# Altium PCB PCB.PcbDoc (part 1 of 3)
Units mil, origin at the board's own origin, x right, y up, seen from the top; angles counter-clockwise.
Board outline 3149.61 x 3937.01 mil, 2 copper layers (Top Layer, Bottom Layer); 240 components, 174 nets, 738 pads, 225 vias.
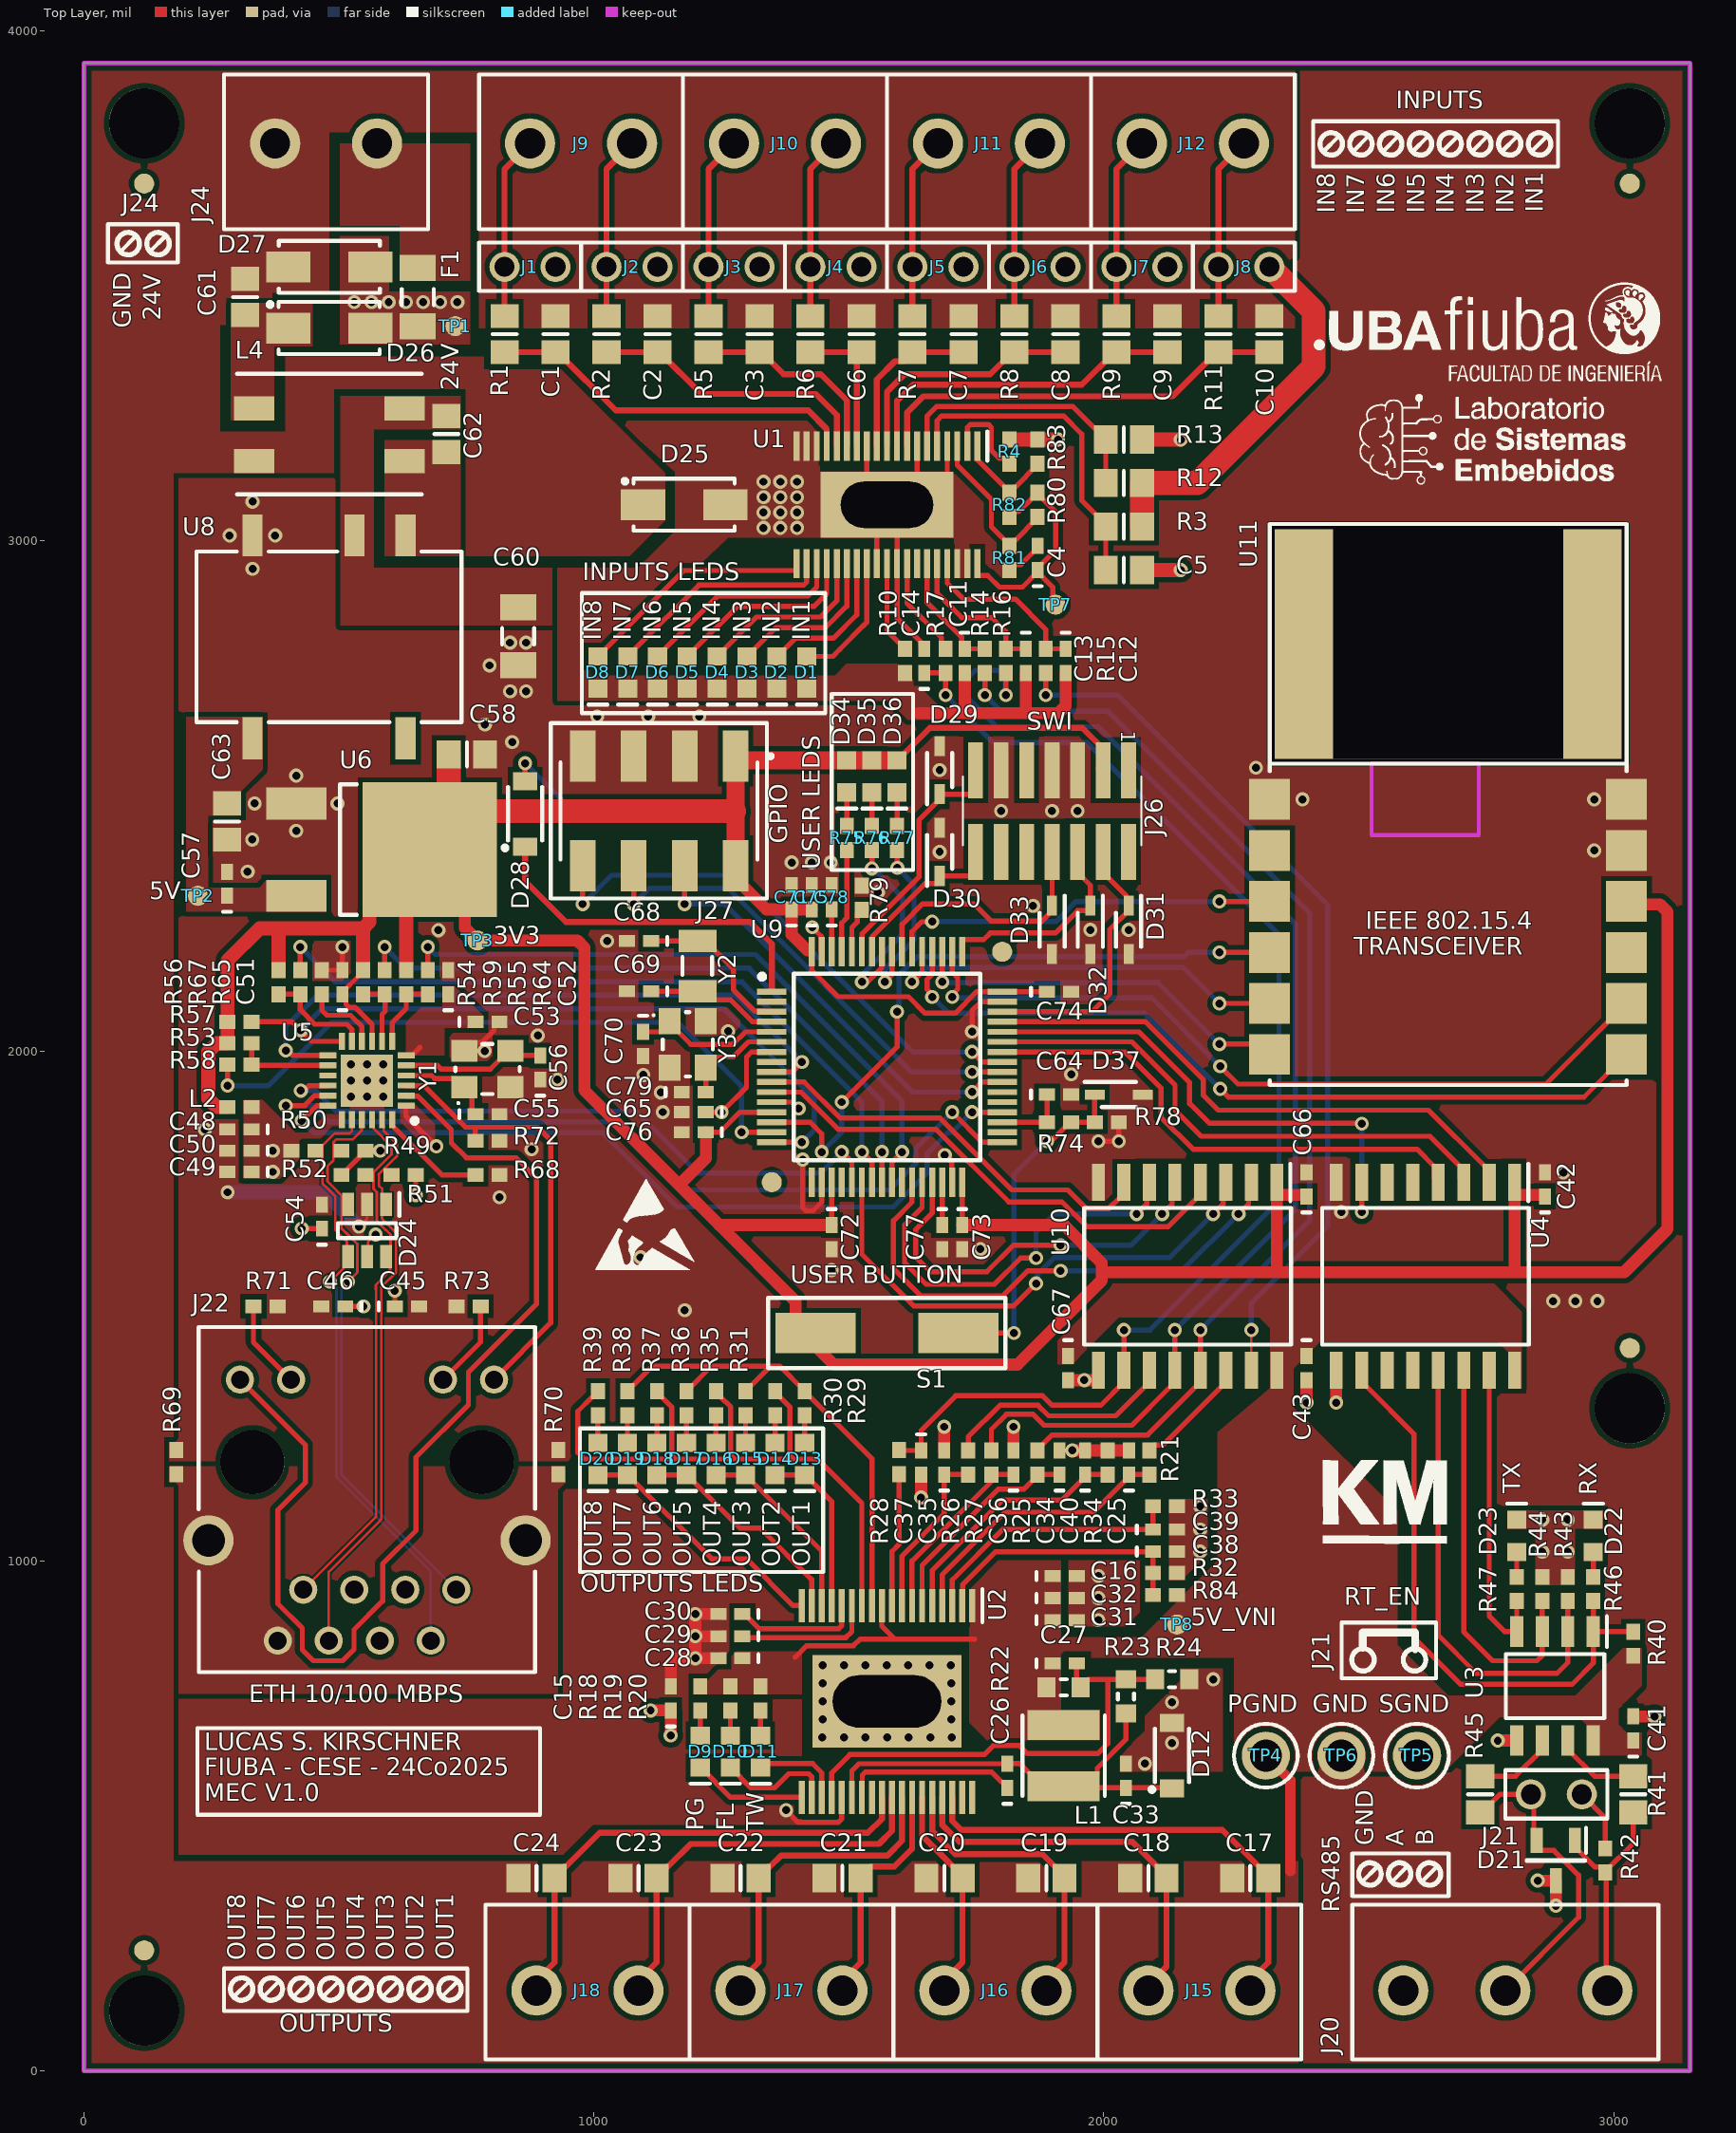
[diagram p0: Top Layer view]
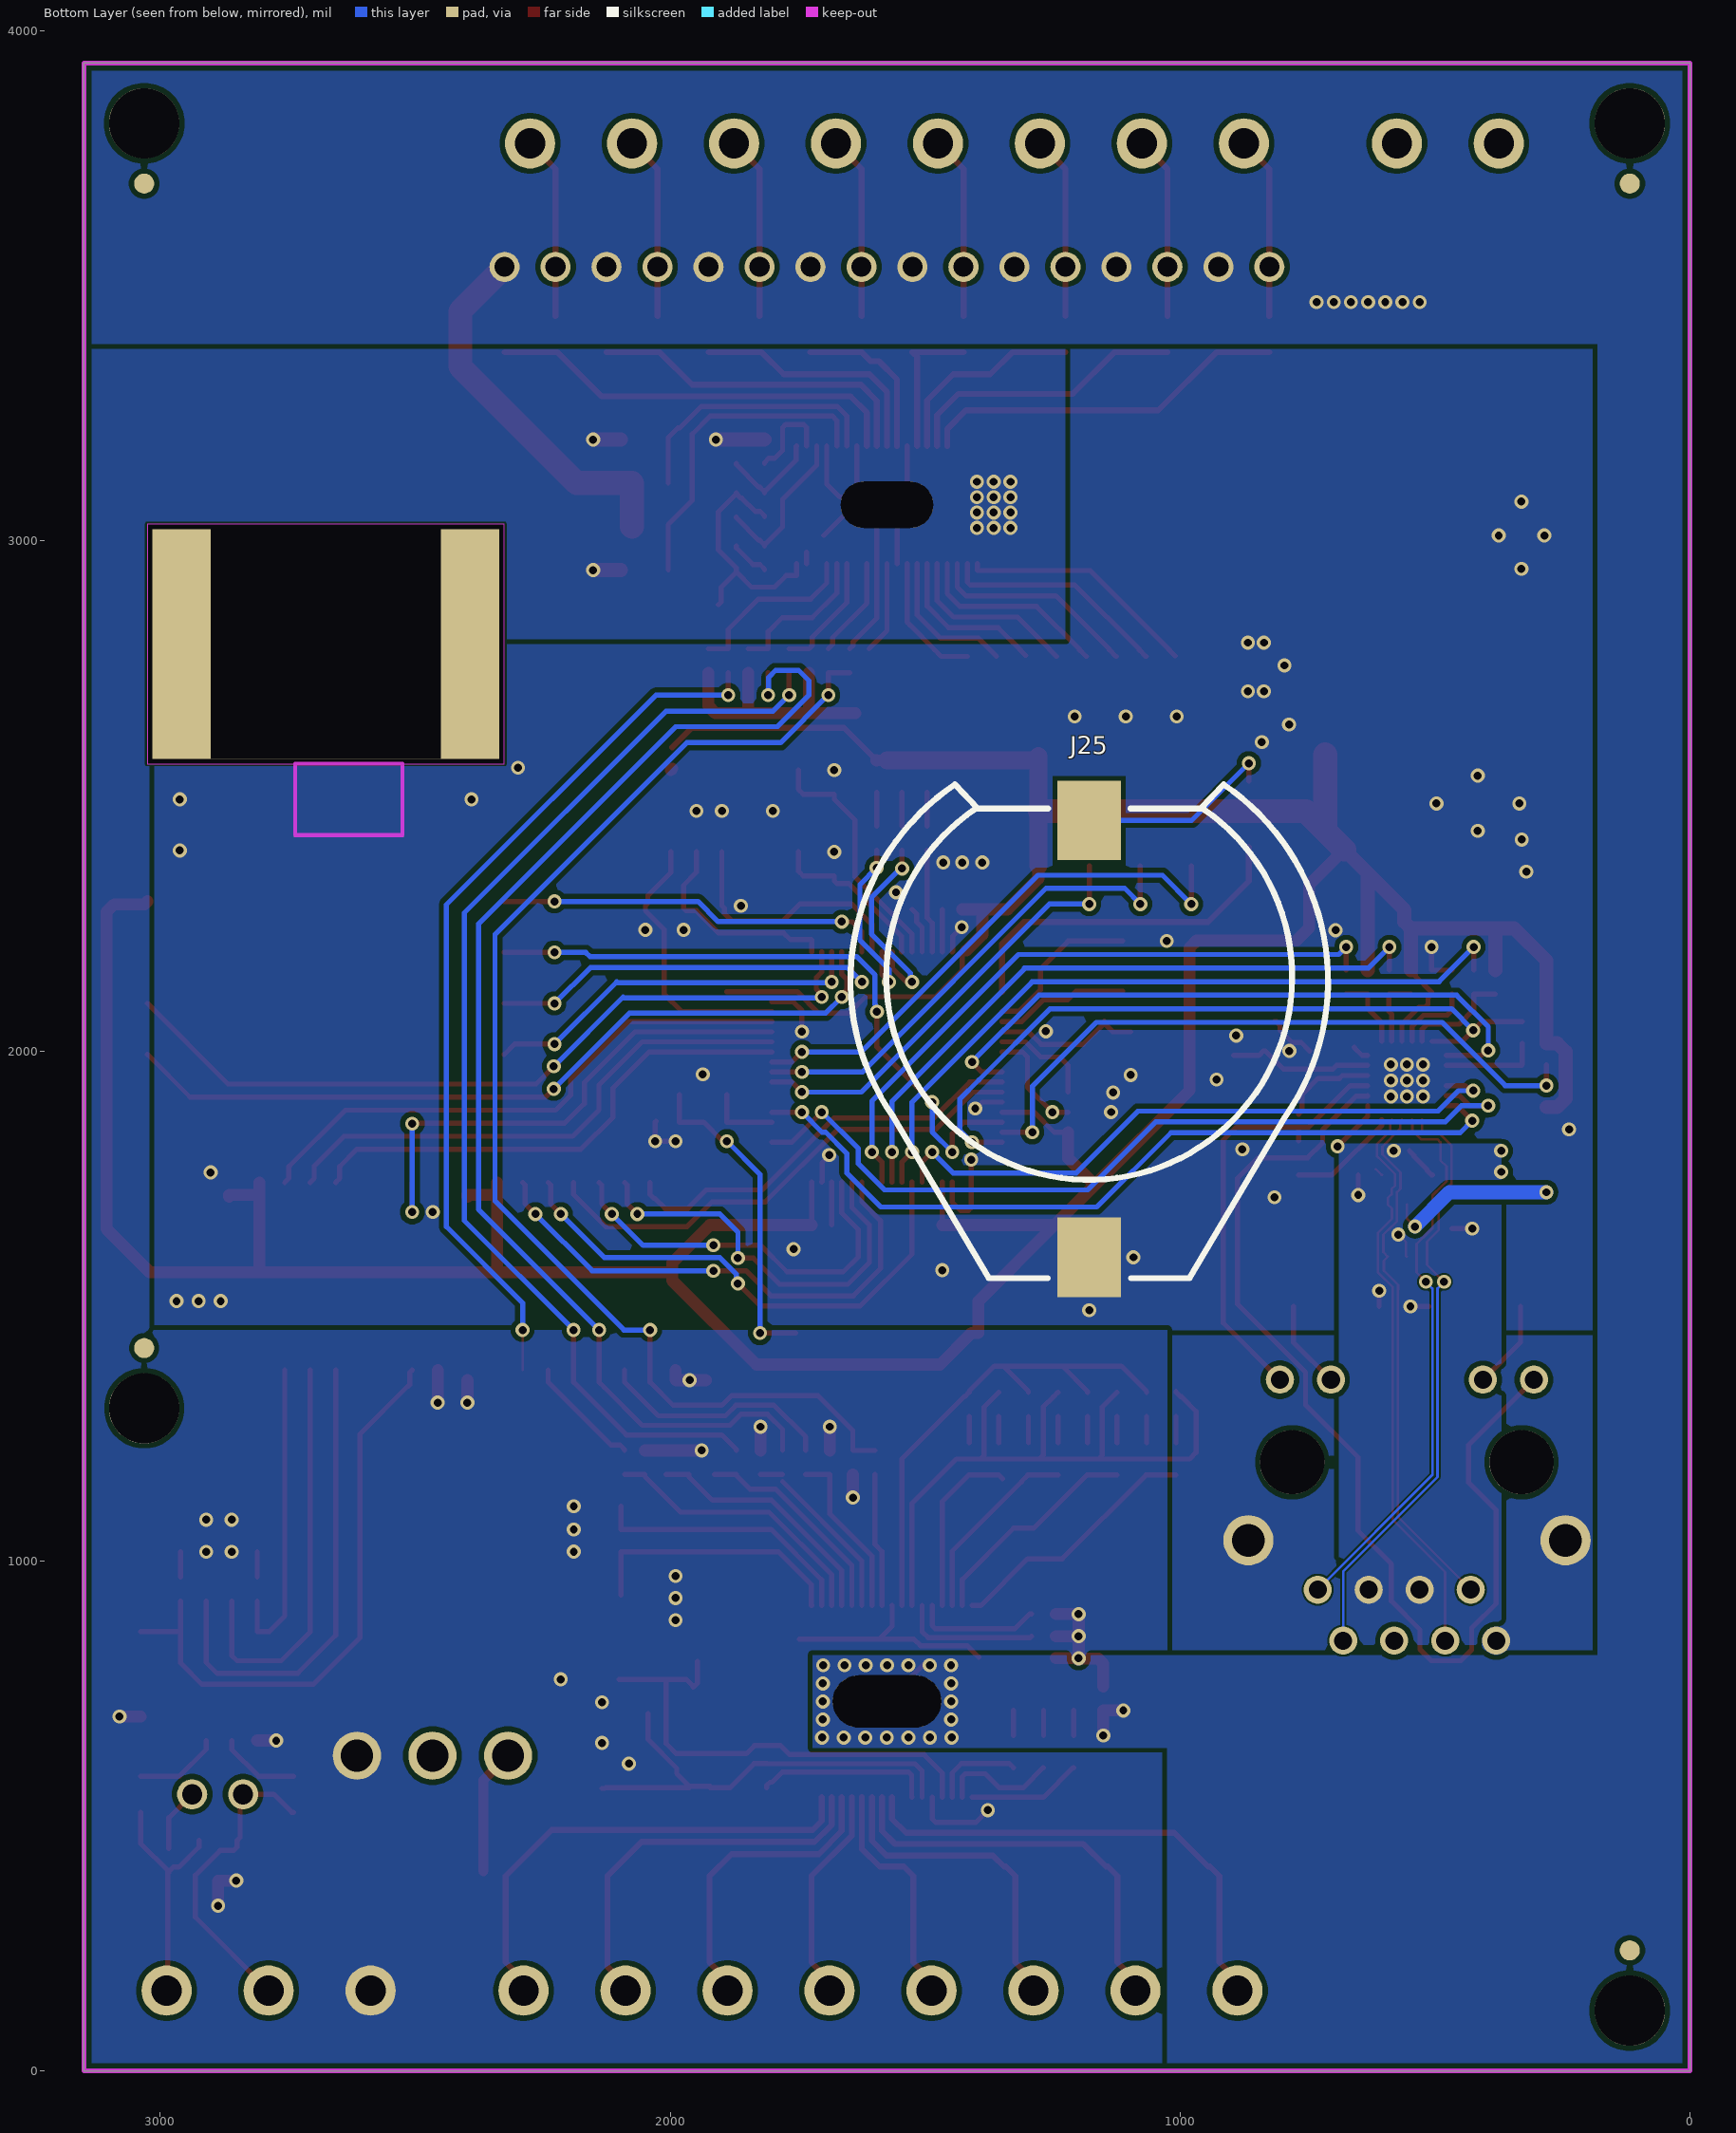
[diagram p1: Bottom Layer view, seen from below]

## Layer stack, top to bottom
Top Solder: solder mask 0.4, Solder Resist, Dk 3.5
Top Layer: signal copper 1.4
Dielectric 1: dielectric 12.6, FR-4, Dk 4.8
Bottom Layer: signal copper 1.4
Bottom Solder: solder mask 0.4, Solder Resist, Dk 3.5

## Board outline
0,0 0,3937.01 3149.61,3937.01 3149.61,0
cut-out: 2325.24,3033.15 3025.24,3033.15 3025.24,2563.15 2325.24,2563.15

## Design rules (kind name [scope] priority, off if disabled: settings)
Clearance Clearance_ETH [InNet('RD_N') or InNet('RD_P') or  InNet('TD_N') or InNet('TD_P')] p1: gap=3.94 ignorepadtopadclearanceinfootprint=FALSE
Clearance [All] p2: gap=5 ignorepadtopadclearanceinfootprint=FALSE except(10: Arc-Poly Track-Poly SMDPad-Poly THPad-Poly Via-Poly Fill-Poly Poly-Poly)
DiffPairsRouting [All] p1: maxlimit=10 minlimit=5 mostfreqgap=5 toplayer_minwidth=5 toplayer_maxwidth=10 toplayer_prefwidth=5 bottomlayer_minwidth=5 bottomlayer_maxwidth=10 bottomlayer_prefwidth=5 maxuncoupledlength=500
HoleSize [All] p1: absolutevalues=TRUE maxlimit=393.7 minlimit=7.87 maxpercent=80.000 minpercent=20.000
HoleToHoleClearance [All] p1: gap=5 allowstackedmicrovias=TRUE
MinimumSolderMaskSliver [All] p1: minsoldermaskwidth=0
PolygonConnect [All] p1: connectstyle=Direct reliefconductorwidth=10 reliefentries=4 polygonreliefangle="90 Angle" airgapwidth=10
RoomDefinition "U_Ethernet Interface (ETH)" [InComponentClass('U_Ethernet Interface (ETH)')] p1: confinementstyle=ConfineIn formatcopy=TRUE lockcomponents=FALSE outline 0,0 1207.48,0 1207.48,2259.84 0,2259.84
RoomDefinition "U_Microcontroller (MCU)" [InComponentClass('U_Microcontroller (MCU)')] p2: confinementstyle=ConfineIn formatcopy=TRUE lockcomponents=FALSE outline 0,0 3149.61,0 3149.61,3937.01 0,3937.01
RoomDefinition "U_RF Transceiver Module (RF)" [InComponentClass('U_RF Transceiver Module (RF)')] p3: confinementstyle=ConfineIn formatcopy=TRUE lockcomponents=FALSE outline 2236.22,1880.91 3113.19,1880.91 3113.19,3084.65 2236.22,3084.65
RoomDefinition "U_Digital Input (DIN)" [InComponentClass('U_Digital Input (DIN)')] p4: confinementstyle=ConfineIn formatcopy=TRUE lockcomponents=FALSE outline 712.6,2637.8 2440.94,2637.8 2440.94,3937.01 712.6,3937.01
RoomDefinition "U_Power Supply (PWR)" [InComponentClass('U_Power Supply (PWR)')] p5: confinementstyle=ConfineIn formatcopy=TRUE lockcomponents=FALSE outline 0,0 2734.25,0 2734.25,3937.01 0,3937.01
RoomDefinition "U_Industrial Serial Comm (RS485)" [InComponentClass('U_Industrial Serial Comm (RS485)')] p6: confinementstyle=ConfineIn formatcopy=TRUE lockcomponents=FALSE outline 2360.24,0 3149.61,0 3149.61,1795.28 2360.24,1795.28
RoomDefinition "U_Digital Output (DOUT)" [InComponentClass('U_Digital Output (DOUT)')] p7: confinementstyle=ConfineIn formatcopy=TRUE lockcomponents=FALSE outline 708.66,0 2425.2,0 2425.2,1417.32 708.66,1417.32
RoutingVias [All] p1: holewidth=15.75 width=27.56 viastyle="Through Hole" minholewidth=7.87 minwidth=15.75 maxholewidth=15.75 maxwidth=27.56
SilkToSilkClearance [All] p1: silktosilkclearance=5
SilkToSolderMaskClearance [IsPad] p1: minsilkscreentomaskgap=5 clearancetoexposedcopper=TRUE
SolderMaskExpansion [All] p1: expansion=4 istentingtop=FALSE
Width [All] p1: maxlimit=200 minlimit=3.94 preferedwidth=10
24 further rules are at their usual default settings.

## Classes and differential pairs
differential pair class MDI_TD: TD
differential pair class MDI_RD: RD
net class RMII: ETH_CRS_DV ETH_MDC ETH_MDIO ETH_REF_CLK ETH_RXD0 ETH_RXD1 ETH_TX_EN ETH_TXD0 ETH_TXD1
component class "U_RF Transceiver Module (RF)": U11
component class "U_Power Supply (PWR)": C57 C58 C60 C61 C62 C63 D25 D26 D27 F1 J24 L4 TP1 TP2 TP3 TP4 TP5 TP6 U6 U8 X2
component class "U_Microcontroller (MCU)": C64 C65 C66 C67 C68 C69 C70 C71 C72 C73 C74 C75 C76 C77 C78 C79 D28 D29 D30 D31 D32 D33 D34 D35 D36 D37 J25 J26 J27 R74 R75 R76 R77 R78 R79 S1 U9 U10 Y2 Y3
component class "U_Industrial Serial Comm (RS485)": C41 C42 C43 D21 D22 D23 J20 J21 R40 R41 R42 R43 R44 R45 R46 R47 U3 U4
component class "U_Ethernet Interface (ETH)": C45 C46 C48 C49 C50 C51 C52 C53 C54 C55 C56 D24 J22 L2 R49 R50 R51 R52 R53 R54 R55 R56 R57 R58 R59 R64 R65 R67 R68 R69 R70 R71 R72 R73 U5 Y1
component class "U_Digital Output (DOUT)": C15 C16 C17 C18 C19 C20 C21 C22 C23 C24 C25 C26 C27 C28 C29 C30 C31 C32 C33 C34 C35 C36 C37 C38 C39 C40 D9 D10 D11 D12 D13 D14 D15 D16 D17 D18 D19 D20 J15 J16 J17 J18 L1 R18 R19 R20 R21 R22 R23 R24 R25 R26 R27 R28 R29 R30 R31 R32 R33 R34 R35 R36 R37 R38 R39 R84 TP8 U2
component class "U_Digital Input (DIN)": C1 C2 C3 C4 C5 C6 C7 C8 C9 C10 C11 C12 C13 C14 D1 D2 D3 D4 D5 D6 D7 D8 J1 J2 J3 J4 J5 J6 J7 J8 J9 J10 J11 J12 R1 R2 R3 R4 R5 R6 R7 R8 R9 R10 R11 R12 R13 R14 R15 R16 R17 R80 R81 R82 R83 TP7 U1
differential pair TD: +TD_P -TD_N
differential pair RD: +RD_P -RD_N

## Components (designator, comment, footprint, x,y, rotation, side; value= is the part's Value field where it differs from the comment)
C1 "Multilayer Ceramic Capacitors" CAPC2012N 924.8,3405.51 r90 top value=22nF
C2 "Multilayer Ceramic Capacitors" CAPC2012N 1124.8,3405.51 r90 top value=22nF
C3 "Multilayer Ceramic Capacitors" CAPC2012N 1324.8,3405.51 r90 top value=22nF
C4 "Multilayer Ceramic Capacitors" CAPC1005N 1870.08,2966.54 r90 top value=100nF
C5 "Multilayer Ceramic Capacitors" CAPC2012N 2039.37,2942.91 r0 top value=33nF
C6 "Multilayer Ceramic Capacitors" CAPC2012N 1524.8,3405.51 r90 top value=22nF
C7 "Multilayer Ceramic Capacitors" CAPC2012N 1724.8,3405.51 r90 top value=22nF
C8 "Multilayer Ceramic Capacitors" CAPC2012N 1924.8,3405.51 r90 top value=22nF
C9 "Multilayer Ceramic Capacitors" CAPC2012N 2124.8,3405.51 r90 top value=22nF
C10 "Multilayer Ceramic Capacitors" CAPC2012N 2324.8,3405.51 r90 top value=22nF
C11 "Multilayer Ceramic Capacitors" CAPC1005N 1727.61,2764.8 r270 top value=33pF
C12 "Multilayer Ceramic Capacitors" CAPC1005N 1925.2,2764.8 r270 top value=33pF
C13 "Multilayer Ceramic Capacitors" CAPC1005N 1846.95,2764.8 r270 top value=33pF
C14 "Multilayer Ceramic Capacitors" CAPC1005N 1648.05,2764.8 r90 top value=33pF
C15 "Multilayer Ceramic Capacitors" CAPC1005N 1150.59,730.32 r90 top value=1uF
C16 "Multilayer Ceramic Capacitors" CAPC1005N 1923.23,970.47 r0 top value=100pF
C17 "Multilayer Ceramic Capacitors" CAPC2012N 2287.48,377.95 r180 top value=22nF
C18 "Multilayer Ceramic Capacitors" CAPC2012N 2087.48,377.95 r180 top value=22nF
C19 "Multilayer Ceramic Capacitors" CAPC2012N 1887.48,377.95 r180 top value=22nF
C20 "Multilayer Ceramic Capacitors" CAPC2012N 1687.48,377.95 r180 top value=22nF
C21 "Multilayer Ceramic Capacitors" CAPC2012N 1487.48,377.95 r180 top value=22nF
C22 "Multilayer Ceramic Capacitors" CAPC2012N 1287.48,377.95 r180 top value=22nF
C23 "Multilayer Ceramic Capacitors" CAPC2012N 1087.48,377.95 r180 top value=22nF
C24 "Multilayer Ceramic Capacitors" CAPC2012N 887.48,377.95 r180 top value=22nF
C25 "Multilayer Ceramic Capacitors" CAPC1005N 2049.41,1192.91 r90 top value=33pF
C26 "Multilayer Ceramic Capacitors" CAPC1005N 1811.02,578.74 r90 top value=22nF
C27 "Multilayer Ceramic Capacitors" CAPC1005N 1923.2,799.21 r0 top value=10nF
C28 "Multilayer Ceramic Capacitors" CAPC1005N 1267.72,809.05 r180 top value=100nF
C29 "Multilayer Ceramic Capacitors" CAPC1005N 1267.72,852.36 r180 top value=10nF
C30 "Multilayer Ceramic Capacitors" CAPC1005N 1267.72,895.67 r180 top value=10nF
C31 "Multilayer Ceramic Capacitors" CAPC1005N 1923.2,883.86 r0 top value=470nF
C32 "Multilayer Ceramic Capacitors" CAPC1005N 1923.2,927.17 r0 top value=4.7uF
C33 "Multilayer Ceramic Capacitors" CAPC1005N 2043.31,578.74 r90 top value=100pF
C34 "Multilayer Ceramic Capacitors" CAPC1005N 1913.38,1192.91 r90 top value=33pF
C35 "Multilayer Ceramic Capacitors" CAPC1005N 1687,1192.91 r90 top value=33pF
C36 "Multilayer Ceramic Capacitors" CAPC1005N 1822.83,1192.91 r90 top value=33pF
C37 "Multilayer Ceramic Capacitors" CAPC1005N 1641.73,1192.91 r270 top value=33pF
C38 "Multilayer Ceramic Capacitors" CAPC1005N 2120.08,1018.11 r0 top value=100pF
C39 "Multilayer Ceramic Capacitors" CAPC1005N 2120.08,1061.62 r0 top value=100pF
C40 "Multilayer Ceramic Capacitors" CAPC1005N 1963.58,1192.91 r90 top value=100pF
C41 "Multilayer Ceramic Capacitors" CAPC1005N 3038.38,671.3 r90 top value=100nF
C42 "Multilayer Ceramic Capacitors" CAPC1005N 2865.16,1738.19 r90 top value=100nF
C43 "Multilayer Ceramic Capacitors" CAPC1005N 2397.64,1377.95 r270 top value=100nF
C45 "Multilayer Ceramic Capacitors" CAPC1005N 633.2,1499.02 r0 top value=100nF
C46 "Multilayer Ceramic Capacitors" CAPC1005N 488.78,1499.02 r180 top value=100nF
C48 "Multilayer Ceramic Capacitors" CAPC1005N 305.12,1846.13 r180 top value=100nF
C49 "Multilayer Ceramic Capacitors" CAPC1005N 305.12,1762.8 r180 top value=100nF
C50 "Multilayer Ceramic Capacitors" CAPC1005N 305.12,1804.46 r180 top value=100nF
C51 "Multilayer Ceramic Capacitors" CAPC1005N 506.89,2134.84 r90 top value=100nF
C52 "Multilayer Ceramic Capacitors" CAPC1005N 714.57,2134.84 r90 top value=1uF
C53 "Multilayer Ceramic Capacitors" CAPC1005N 791.34,2057.09 r0 top value=470pF
C54 "Multilayer Ceramic Capacitors" CAPC1005N 466.54,1675.2 r90 top value=100nF
C55 "Multilayer Ceramic Capacitors" CAPC1005N 791.34,1875.98 r0 top value=12pF
C56 "Multilayer Ceramic Capacitors" CAPC1005N 894.68,1967.52 r90 top value=12pF
C57 "Multilayer Ceramic Capacitors" CAPC1005N 280.51,2327.76 r90 top value=100nF
C58 "Multilayer Ceramic Capacitors" CAPC2012N 750.99,2581.69 r0 top value=10uF
C60 "Multilayer Ceramic Capacitors" CAPC3216N 851.38,2812.99 r270 top value=1000pF
C61 "Multilayer Ceramic Capacitors" CAPC2012N 315.95,3478.35 r90 top value=4.7uF
C62 "Multilayer Ceramic Capacitors" CAPC2012N 711.01,3209.65 r270 top value=4.7uF
C63 "Multilayer Ceramic Capacitors" CAPC2012N 280.51,2449.8 r270 top value=10uF
C64 "Multilayer Ceramic Capacitors" CAPC1005N 1912.4,1914.37 r0 top value=100nF
C65 "Multilayer Ceramic Capacitors" CAPC1005N 1195.87,1879.92 r180 top value=100nF
C66 "Multilayer Ceramic Capacitors" CAPC1005N 2397.64,1738.19 r90 top value=100nF
C67 "Multilayer Ceramic Capacitors" CAPC1005N 1930.12,1377.95 r270 top value=100nF
C68 "Multilayer Ceramic Capacitors" CAPC1005N 1088.61,2215.55 r180 top value=12pF
C69 "Multilayer Ceramic Capacitors" CAPC1005N 1088.61,2117.13 r180 top value=12pF
C70 "Multilayer Ceramic Capacitors" CAPC1005N 1096.46,2013.81 r270 top value=12pF
C71 "Multilayer Ceramic Capacitors" CAPC1005N 1387.8,2301.18 r90 top value=4.7uF
C72 "Multilayer Ceramic Capacitors" CAPC1005N 1466.54,1634.84 r270 top value=100nF
C73 "Multilayer Ceramic Capacitors" CAPC1005N 1722.44,1634.84 r270 top value=100nF
C74 "Multilayer Ceramic Capacitors" CAPC1005N 1912.4,2116.14 r0 top value=100nF
C75 "Multilayer Ceramic Capacitors" CAPC1005N 1427.17,2301.18 r90 top value=100nF
C76 "Multilayer Ceramic Capacitors" CAPC1005N 1195.87,1840.55 r180 top value=100nF
C77 "Multilayer Ceramic Capacitors" CAPC1005N 1683.07,1634.84 r270 top value=2.2uF
C78 "Multilayer Ceramic Capacitors" CAPC1005N 1466.54,2301.18 r90 top value=2.2uF
C79 "Multilayer Ceramic Capacitors" CAPC1005N 1195.87,1919.29 r0 top value=12pF
D1 "Single Color LED" LEDC1608X80N_GREEN 1417.32,2742.13 r90 top value=Green
D2 "Single Color LED" LEDC1608X80N_GREEN 1358.83,2742.13 r90 top value=Green
D3 "Single Color LED" LEDC1608X80N_GREEN 1300.34,2742.13 r90 top value=Green
D4 "Single Color LED" LEDC1608X80N_GREEN 1241.84,2742.13 r90 top value=Green
D5 "Single Color LED" LEDC1608X80N_GREEN 1183.35,2742.13 r90 top value=Green
D6 "Single Color LED" LEDC1608X80N_GREEN 1124.86,2742.13 r90 top value=Green
D7 "Single Color LED" LEDC1608X80N_GREEN 1066.37,2742.13 r90 top value=Green
D8 "Single Color LED" LEDC1608X80N_GREEN 1007.87,2742.13 r90 top value=Green
D9 "Single Color LED" LEDC1608X80N_RED 1208.66,625.98 r90 top value=Red
D10 "Single Color LED" LEDC1608X80N_RED 1267.72,625.98 r90 top value=Red
D11 "Single Color LED" LEDC1608X80N_RED 1326.77,625.98 r90 top value=Red
D12 "Schottky Diodes" SOD3705X110-2N 2133.86,618.11 r90 top
D13 "Single Color LED" LEDC1608X80N_GREEN 1413.39,1199.77 r90 top value=Green
D14 "Single Color LED" LEDC1608X80N_GREEN 1355.46,1199.77 r90 top value=Green
D15 "Single Color LED" LEDC1608X80N_GREEN 1297.52,1199.77 r90 top value=Green
D16 "Single Color LED" LEDC1608X80N_GREEN 1239.59,1199.77 r90 top value=Green
D17 "Single Color LED" LEDC1608X80N_GREEN 1181.66,1199.77 r90 top value=Green
D18 "Single Color LED" LEDC1608X80N_GREEN 1123.73,1199.77 r90 top value=Green
D19 "Single Color LED" LEDC1608X80N_GREEN 1065.8,1199.77 r90 top value=Green
D20 "Single Color LED" LEDC1608X80N_GREEN 1007.87,1199.77 r90 top value=Green
D21 "ESD Protection Diodes" SOT95P230X117-3N 2886.5,412.4 r270 top
D22 "Single Color LED" LEDC1608X80N_GREEN 2959.92,1049.21 r270 top value=Green
D23 "Single Color LED" LEDC1608X80N_YELLOW 2809.92,1049.21 r270 top value=Yellow
D24 "ESD Protection Diodes" SOT95P280X145-6N 555.32,1647.64 r270 top
D25 "Schottky Diodes" DIOM5026X229N 1177.17,3070.87 r0 top
D26 "Schottky Diodes" DIOM5026X229N 481.14,3417.33 r0 top
D27 "ESD Protection Diodes" DIOM5026X229N_NP 481.14,3537.4 r0 top value=26V
D28 "Schottky Diodes" SOD3705X110-2N 865.16,2464.57 r90 top
D29 "ESD Protection Diodes" SOD2512X110N 1678.15,2550.59 r90 top value=3.3V
D30 "ESD Protection Diodes" SOD2512X110N 1678.15,2390.35 r90 top value=3.3V
D31 "ESD Protection Diodes" SOD2512X110N 2048.62,2237.44 r270 top value=3.3V
D32 "ESD Protection Diodes" SOD2512X110N 1973.62,2237.44 r270 top value=3.3V
D33 "ESD Protection Diodes" SOD2512X110N 1898.62,2237.44 r270 top value=3.3V
D34 "Single Color LED" LEDC1608X80N_RED 1496.06,2538.39 r90 top value=Red
D35 "Single Color LED" LEDC1608X80N_YELLOW 1545.27,2538.39 r90 top value=Yellow
D36 "Single Color LED" LEDC1608X80N_GREEN 1594.49,2538.39 r90 top value=Green
D37 "ESD Protection Diodes" SOD2512X110N 2029.53,1914.37 r0 top value=3.3V
F1 "Cartridge Fuse" RESC3216N 654.53,3478.35 r270 top
J1 "Male straight header" CONH_ML254P-2N 874.8,3537.51 r0 top
J2 "Male straight header" CONH_ML254P-2N 1074.8,3537.51 r0 top
J3 "Male straight header" CONH_ML254P-2N 1274.8,3537.51 r0 top
J4 "Male straight header" CONH_ML254P-2N 1474.8,3537.51 r0 top
J5 "Male straight header" CONH_ML254P-2N 1674.8,3537.51 r0 top
J6 "Male straight header" CONH_ML254P-2N 1874.8,3537.51 r0 top
J7 "Male straight header" CONH_ML254P-2N 2074.8,3537.51 r0 top
J8 "Male straight header" CONH_ML254P-2N 2274.8,3537.51 r0 top
J9 "Terminal Blocks" CONB_FIX508P-2N 974.8,3779.53 r180 top
J10 "Terminal Blocks" CONB_FIX508P-2N 1374.8,3779.53 r180 top
J11 "Terminal Blocks" CONB_FIX508P-2N 1774.8,3779.53 r180 top
J12 "Terminal Blocks" CONB_FIX508P-2N 2174.8,3779.53 r180 top
J15 "Terminal Blocks" CONB_FIX508P-2N 2187.48,157.48 r0 top
J16 "Terminal Blocks" CONB_FIX508P-2N 1787.48,157.48 r0 top
J17 "Terminal Blocks" CONB_FIX508P-2N 1387.48,157.48 r0 top
J18 "Terminal Blocks" CONB_FIX508P-2N 987.48,157.48 r0 top
J20 "Terminal Blocks" CONB_FIX508P-3N 2787.48,157.48 r0 top
J21 "Male straight header" CONH_ML254P-2N 2887.48,542.32 r0 top
J22 "Magnetic Jack Ethernet" RJ45-8P8C-VERT-THT-MAGJACK 555.11,1099.41 r0 top
J24 "Terminal Blocks" CONB_FIX508P-2N 474.8,3779.53 r180 top
J25 "Cell Battery Holders" CONB_BH_CR2032-2N 1178.15,2023.62 r180 bottom
J26 "Male straight header" CONH_ML127P-14N 1898.62,2470.47 r0 top
J27 "Male straight header" CONH_ML254P-SMT-8N 1128.03,2470.47 r180 top
L1 "Power Inductor" INDP4018220N 1921.26,618.11 r90 top value=100uH
L2 "Ferrite Beads" INDC1005N 305.12,1889.76 r0 top value=600R
L4 "Common Mode Chokes" INDC6X9.2-4N 481.14,3209.65 r0 top
R1 "Thick Film Resistors" RESC2012N 824.8,3405.51 r270 top value=2.2K
R2 "Thick Film Resistors" RESC2012N 1024.8,3405.51 r270 top value=2.2K
R3 "Thick Film Resistors" RESC2012N 2039.37,3028.22 r180 top value=1K
R4 "Thick Film Resistors" RESC1005N 1814.96,3175.2 r270 top value=51K
R5 "Thick Film Resistors" RESC2012N 1224.8,3405.51 r270 top value=2.2K
R6 "Thick Film Resistors" RESC2012N 1424.8,3405.51 r270 top value=2.2K
R7 "Thick Film Resistors" RESC2012N 1624.8,3405.51 r270 top value=2.2K
R8 "Thick Film Resistors" RESC2012N 1824.8,3405.51 r270 top value=2.2K
R9 "Thick Film Resistors" RESC2012N 2024.8,3405.51 r270 top value=2.2K
R10 "Thick Film Resistors" RESC1005N 1610.24,2764.8 r270 top value=15K
R11 "Thick Film Resistors" RESC2012N 2224.8,3405.51 r270 top value=2.2K
R12 "Thick Film Resistors" RESC2012N 2039.37,3113.52 r180 top value=1M
R13 "Thick Film Resistors" RESC2012N 2039.37,3198.82 r180 top value=82K
R14 "Thick Film Resistors" RESC1005N 1766.73,2764.8 r90 top value=220R
R15 "Thick Film Resistors" RESC1005N 1886.07,2764.8 r90 top value=220R
R16 "Thick Film Resistors" RESC1005N 1807.82,2764.8 r90 top value=220R
R17 "Thick Film Resistors" RESC1005N 1689.8,2764.8 r90 top value=220R
R18 "Thick Film Resistors" RESC1005N 1208.66,730.32 r90 top value=680R
R19 "Thick Film Resistors" RESC1005N 1267.72,730.32 r90 top value=680R
R20 "Thick Film Resistors" RESC1005N 1326.77,730.32 r90 top value=680R
R21 "Thick Film Resistors" RESC1005N 2089.56,1192.91 r270 top value=220R
R22 "Thick Film Resistors" RESC1608N 1921.26,751.97 r180 top value=2K
R23 "Thick Film Resistors" RESC1608N 2043.31,734.25 r90 top value=10K
R24 "Thick Film Resistors" RESC1608N 2133.86,767.72 r180 top value=3.3K
R25 "Thick Film Resistors" RESC1005N 1870.07,1192.91 r270 top value=220R
R26 "Thick Film Resistors" RESC1005N 1734.25,1192.91 r270 top value=220R
R27 "Thick Film Resistors" RESC1005N 1779.52,1192.91 r270 top value=220R
R28 "Thick Film Resistors" RESC1005N 1598.42,1193.9 r270 top value=220R
R29 "Thick Film Resistors" RESC1005N 1413.38,1309.06 r90 top value=680R
R30 "Thick Film Resistors" RESC1005N 1355.45,1309.06 r90 top value=680R
R31 "Thick Film Resistors" RESC1005N 1297.52,1309.06 r90 top value=680R
R32 "Thick Film Resistors" RESC1005N 2120.08,976.58 r180 top value=10K
R33 "Thick Film Resistors" RESC1005N 2120.08,1107.09 r180 top value=10K
R34 "Thick Film Resistors" RESC1005N 2007.87,1192.91 r270 top value=10K
R35 "Thick Film Resistors" RESC1005N 1239.59,1309.06 r90 top value=680R
R36 "Thick Film Resistors" RESC1005N 1181.66,1309.06 r90 top value=680R
R37 "Thick Film Resistors" RESC1005N 1123.73,1309.06 r90 top value=680R
R38 "Thick Film Resistors" RESC1005N 1065.8,1309.06 r90 top value=680R
R39 "Thick Film Resistors" RESC1005N 1007.87,1309.06 r90 top value=680R
R40 "Thick Film Resistors" RESC1005N 3038.38,837.6 r270 top value=10K
R41 "Thick Film Resistors" RESC2012N 3038.38,542.32 r270 top value=10R
R42 "Thick Film Resistors" RESC1005N 2983.27,412.4 r270 top value=120R
R43 "Thick Film Resistors" RESC1005N 2909.92,944.88 r270 top value=10K
R44 "Thick Film Resistors" RESC1005N 2859.92,944.88 r270 top value=10K
R45 "Thick Film Resistors" RESC2012N 2738.19,542.32 r270 top value=10R
R46 "Thick Film Resistors" RESC1005N 2959.92,944.88 r270 top value=1K
R47 "Thick Film Resistors" RESC1005N 2809.92,944.88 r270 top value=1K
R49 "Thick Film Resistors" RESC1005N 528.54,1804.14 r0 top value=49.9R
R50 "Thick Film Resistors" RESC1005N 430.12,1804.13 r180 top value=49.9R
R51 "Thick Film Resistors" RESC1005N 626.97,1756.89 r0 top value=49.9R
R52 "Thick Film Resistors" RESC1005N 528.54,1756.89 r180 top value=49.9R
R53 "Thick Film Resistors" RESC1005N 305.12,2014.76 r180 top value=10K
R54 "Thick Film Resistors" RESC1005N 547.24,2134.84 r90 top value=10K
R55 "Thick Film Resistors" RESC1005N 631.89,2134.84 r90 top value=10K
R56 "Thick Film Resistors" RESC1005N 381.89,2134.84 r90 top value=10K
R57 "Thick Film Resistors" RESC1005N 305.12,2057.09 r180 top value=1.5K
R58 "Thick Film Resistors" RESC1005N 305.12,1973.1 r180 top value=33R
R59 "Thick Film Resistors" RESC1005N 589.57,2134.84 r90 top value=33R
R64 "Thick Film Resistors" RESC1005N 674.21,2134.84 r90 top value=33R
R65 "Thick Film Resistors" RESC1005N 466.53,2134.84 r90 top value=10K
R67 "Thick Film Resistors" RESC1005N 424.21,2134.84 r90 top value=33R
R68 "Thick Film Resistors" RESC1005N 791.34,1756.89 r180 top value=12.1K
R69 "Thick Film Resistors" RESC1005N 181.1,1193.51 r270 top value=0R
R70 "Thick Film Resistors" RESC1005N 930.12,1193.51 r270 top value=0R
R71 "Thick Film Resistors" RESC1005N 356.1,1499.02 r0 top value=330R
R72 "Thick Film Resistors" RESC1005N 791.34,1823.82 r180 top value=10K
R73 "Thick Film Resistors" RESC1005N 754.13,1499.02 r0 top value=330R
R74 "Thick Film Resistors" RESC1005N 1912.4,1860.24 r0 top value=330R
R75 "Thick Film Resistors" RESC1005N 1496.06,2417.32 r90 top value=330R
R76 "Thick Film Resistors" RESC1005N 1545.27,2417.32 r90 top value=330R
R77 "Thick Film Resistors" RESC1005N 1594.49,2417.32 r90 top value=330R
R78 "Thick Film Resistors" RESC1005N 2005.9,1860.24 r180 top value=100K
R79 "Thick Film Resistors" RESC1005N 1525.59,2300.2 r270 top value=10K
R80 "Thick Film Resistors" RESC1005N 1870.08,3070.87 r90 top value=0R
R81 "Thick Film Resistors" RESC1005N 1814.96,2966.54 r90 top value=0R
R82 "Thick Film Resistors" RESC1005N 1814.96,3070.87 r270 top value=0R
R83 "Thick Film Resistors" RESC1005N 1870.08,3175.2 r270 top value=0R
R84 "Thick Film Resistors" RESC1005N 2120.08,933.07 r0 top value=0R
S1 "Tactile Switches" PKG3.5X6-2N 1574.8,1446.85 r180 top
TP1 "Test point" TP-1MM 728.35,3421.26 r90 top
TP2 "Test point" TP-1MM 223.43,2304.13 r90 top
TP3 "Test point" TP-1MM 771.68,2216.54 r90 top
TP4 "Test point" TPH1.6D3.2BLK 2317.91,618.11 r0 top
TP5 "Test point" TPH1.6D3.2BLK 2614.17,618.11 r0 top
TP6 "Test point" TPH1.6D3.2BLK 2466.04,618.11 r0 top
TP7 "Test point" TP-1MM 1905.51,2875 r90 top
TP8 "Test point" TP-1MM 2143.7,875 r90 top
U1 "I/O Controller Interface" SOP50P640X110-39N 1574.8,3070.87 r270 top
U2 "Power Switch ICs" SOP50P1030X245-37N 1574.8,724.41 r270 top
U3 "RS-485 Interface" SOIC127P600X175-8N 2884.92,754.45 r270 top
U4 "Digital Isolators" SOIC127P1030X265-16N 2630.9,1558.07 r270 top
U5 "Ethernet PHY" QFN50P400X400X100-25N-D 555.11,1941.93 r180 top
U6 "LDO Voltage Regulators" TO252P170-3N 547.25,2394.69 r0 top
U8 "Isolated DC/DC Converter" PKG10.8X12.8-5N 480.71,2812.01 r180 top
U9 "ARM Cortex M33 MCU" QFP50P1200X1200X160-64N 1574.8,1968.5 r0 top
U10 "Digital Isolators" SOIC127P1030X265-16N 2164.37,1558.07 r270 top
U11 "RF Transceiver Module" PKG1100X700-12N 2675.24,2243.15 r0 top
Y1 "Crystal" XTAL3225 791.34,1964.57 r0 top value=25MHz
Y2 "Crystal" XTAL3215 1203.74,2166.34 r90 top value=32.768kHz
Y3 "Crystal" XTAL3225 1184.06,2012.8 r270 top value=25MHz

## Footprints (in the part's own frame and the unit in brackets; to place one, negate y for a bottom-side part, rotate by r counter-clockwise, add the part's x,y. Pads: shape width x height; smd on the part's side, far side on the other; paste and mask are expansions set on the pad)
CAPC1005N [mm] "Chip Capacitor, Body 1.0x0.5mm, IPC Medium Density"
  rect 0.8x0.6 smd: 1(-0.6,0) 2(0.6,0)
  silkscreen extent -1.4,-0.2 -1.4,0.2, body extent -0.5,-0.25 0.5,0.25, height 0.55
CAPC2012N [mm] "Chip Capacitor, Body 2.0x1.3mm, IPC Medium Density"
  rect 1.2x1.4 smd: 1(-0.9,0) 2(0.9,0)
  silkscreen extent 0,-0.6 0,0.6, body extent -1,-0.6 1,0.6, height 0.7
CAPC3216N [mm] "Chip Capacitor, Body 3.2x1.6mm, IPC Medium Density"
  rect 1.3x1.8 smd: 1(-1.45,0) 2(1.45,0)
  silkscreen extent -0.4,-0.8 0.4,0.8, body extent -1.6,-0.75 1.6,0.75, height 1.68
CONB_BH_CR2032-2N [mm]
  rect 3.17x3.96 smd: 1(0,-10.88) 2(0,10.88)
  silkscreen extent -11.89,-11.92 11.89,12.67, body extent -11.37,-12.85 11.37,12.92, height 7.37
CONB_FIX508P-2N [mm] "Pluggable Terminal Blocks, 2pos, pitch 5.08mm"
  round 2.5 hole 1.5 mask+0.102: 1(-2.54,0) 2(2.54,0)
  silkscreen extent -5.08,-3.43 5.08,4.27, body extent -5.5,-3.45 5,4.35, height 10
CONB_FIX508P-3N [mm] "Pluggable Terminal Blocks, 3pos, pitch 5.08mm"
  round 2.5 hole 1.5 mask+0.102: 1(-5.08,0) 2(0,0) 3(5.08,0)
  silkscreen extent -7.62,-3.43 7.62,4.27, body extent -8.12,-3.45 7.46,4.35, height 10
CONH_ML127P-14N [mm]
  rect 0.74x2.79 smd: 1(3.81,2.035) 2(3.81,-2.035) 3(2.54,2.035) 4(2.54,-2.035) 5(1.27,2.035) 6(1.27,-2.035) 7(0,2.035) 8(0,-2.035) 9(-1.27,2.035) 10(-1.27,-2.035) 11(-2.54,2.035) 12(-2.54,-2.035) 13(-3.81,2.035) 14(-3.81,-2.035)
  silkscreen extent -4.44,-1.71 4.44,1.72, body extent -4.44,-2.92 4.44,2.92, height 6.12
CONH_ML254P-2N [mm] "Vertical male header, 2 pos, 2.54mm pitch"
  round 1.5 hole 1: 1(-1.27,0) 2(1.27,0)
  silkscreen extent -2.54,-1.2 2.54,1.2, body extent -2.54,-1.27 2.54,1.27, height 8.89
CONH_ML254P-SMT-8N [mm]
  rect 1.27x2.54 smd: 1(-3.81,-2.73) 2(-3.81,2.73) 3(-1.27,-2.73) 4(-1.27,2.73) 5(1.27,-2.73) 6(1.27,2.73) 7(3.81,-2.73) 8(3.81,2.73)
  silkscreen extent -5.65,-2.83 4.92,2.42, body extent -5.04,-3.65 5.06,3.65, height 9.7
DIOM5026X229N [mm] "SMA (DO-214AC) Bi-Directional"
  rect 2.2x1.55 smd: A(2.05,0) C(-2.05,0)
  silkscreen extent -3.04,-1.29 2.51,1.31, body extent -2.52,-1.3 2.52,1.3, height 2.29
DIOM5026X229N_NP [mm] "SMA (DO-214AC) Bi-Directional"
  rect 2.2x1.55 smd: 1(-2.05,0) 2(2.05,0)
  silkscreen extent -2.52,-1.3 2.52,1.3, body extent -2.52,-1.3 2.52,1.3, height 2.29
INDC6X9.2-4N [mm] "Common Mode Chokes Width 6mm, Length 9.2mm, Height 5mm"
  rect 2x1.2 smd: 1(-3.75,1.27) 2(-3.75,-1.34) 3(3.75,-1.34) 4(3.75,1.27)
  silkscreen extent -4.6,-3 4.6,3, body extent -4.6,-3 4.6,3, height 5
INDC1005N [mm]
  rect 0.8x0.7 smd: 1(-0.6,0) 2(0.6,0)
  body extent -0.5,-0.25 0.5,0.25, height 0.5
INDP4018220N [mm]
  rect 1.5x3.6 smd: 1(-1.525,0) 2(1.525,0)
  silkscreen extent -2,-2.05 2,2.05, body extent -2,-2 2,2, height 1.65
LEDC1608X80N_GREEN [mm]
  rect 0.9x0.95 smd: A(0.8,0) C(-0.8,0)
  silkscreen extent -1.6,-0.48 -1.6,0.48, body extent -0.8,-0.4 0.8,0.4, height 0.55
LEDC1608X80N_RED [mm]
  rect 0.9x0.95 smd: A(0.8,0) C(-0.8,0)
  silkscreen extent -1.6,-0.48 -1.6,0.48, body extent -0.8,-0.4 0.8,0.4, height 0.55
LEDC1608X80N_YELLOW [mm]
  rect 0.9x0.95 smd: A(0.8,0) C(-0.8,0)
  silkscreen extent -1.6,-0.48 -1.6,0.48, body extent -0.8,-0.4 0.8,0.4, height 0.55
PKG3.5X6-2N [mm]
  rect 4x2 smd: 1(-3.55,0) 2(3.55,0)
  silkscreen extent -5.9,-1.75 5.92,1.75, body extent -4.98,-1.75 4.98,1.75, height 4.41
PKG10.8X12.8-5N [mm] "DC/DC Converters 24Vin 5Vout 2W 3kV"
  rect 1x2.1 smd: 1(-3.81,-5.05) 2(-1.27,-5.05) 4(3.81,-5.05) 5(3.81,5.05) 8(-3.81,5.05)
  silkscreen extent -6.6,-4.25 6.6,4.25, body extent -6.6,-5.7 6.6,5.7, height 7.25
PKG1100X700-12N [mil]
  rect 80x80 smd: 1(-350,250) 2(-350,150) 3(-350,50) 4(-350,-50) 5(-350,-150) 6(-350,-250) 7(350,-250) 8(350,-150) 9(350,-50) 10(350,50) 11(350,150) 12(350,250)
  Keep-Out Layer lines w7.87: -150,180 -150,320 60,320 60,180 -150,180
  silkscreen extent -350,-310 350,790, body extent -350,-310 350,790, height 68
QFN50P400X400X100-25N-D [mm]
  rect 0.85x0.3 smd: 1(-1.95,1.25) 2(-1.95,0.75) 3(-1.95,0.25) 4(-1.95,-0.25) 5(-1.95,-0.75) 6(-1.95,-1.25) 13(1.95,-1.25) 14(1.95,-0.75) 15(1.95,-0.25) 16(1.95,0.25) 17(1.95,0.75) 18(1.95,1.25)
  rect 0.3x0.85 smd: 7(-1.25,-1.95) 8(-0.75,-1.95) 9(-0.25,-1.95) 10(0.25,-1.95) 11(0.75,-1.95) 12(1.25,-1.95) 19(1.25,1.95) 20(0.75,1.95) 21(0.25,1.95) 22(-0.25,1.95) 23(-0.75,1.95) 24(-1.25,1.95)
  rect 2.6x2.6 smd: 25(0,0)
  silkscreen extent -2.5,1.88 -2.25,2.12, body extent -2.05,-2.05 2.05,2.05, height 1
QFP50P1200X1200X160-64N [mm]
  rect 1.475x0.3 smd: 1(-5.738,3.75) 2(-5.738,3.25) 3(-5.738,2.75) 4(-5.738,2.25) 5(-5.738,1.75) 6(-5.738,1.25) 7(-5.738,0.75) 8(-5.738,0.25) 9(-5.738,-0.25) 10(-5.738,-0.75) 11(-5.738,-1.25) 12(-5.738,-1.75) 13(-5.738,-2.25) 14(-5.738,-2.75) 15(-5.738,-3.25) 16(-5.738,-3.75) 33(5.738,-3.75) 34(5.738,-3.25) 35(5.738,-2.75) 36(5.738,-2.25) 37(5.738,-1.75) 38(5.738,-1.25) 39(5.738,-0.75) 40(5.738,-0.25) 41(5.738,0.25) 42(5.738,0.75) 43(5.738,1.25) 44(5.738,1.75) 45(5.738,2.25) 46(5.738,2.75) 47(5.738,3.25) 48(5.738,3.75)
  rect 0.3x1.475 smd: 17(-3.75,-5.738) 18(-3.25,-5.738) 19(-2.75,-5.738) 20(-2.25,-5.738) 21(-1.75,-5.738) 22(-1.25,-5.738) 23(-0.75,-5.738) 24(-0.25,-5.738) 25(0.25,-5.738) 26(0.75,-5.738) 27(1.25,-5.738) 28(1.75,-5.738) 29(2.25,-5.738) 30(2.75,-5.738) 31(3.25,-5.738) 32(3.75,-5.738) 49(3.75,5.738) 50(3.25,5.738) 51(2.75,5.738) 52(2.25,5.738) 53(1.75,5.738) 54(1.25,5.738) 55(0.75,5.738) 56(0.25,5.738) 57(-0.25,5.738) 58(-0.75,5.738) 59(-1.25,5.738) 60(-1.75,5.738) 61(-2.25,5.738) 62(-2.75,5.738) 63(-3.25,5.738) 64(-3.75,5.738)
  round 1 smd mask+0.5: FD1(-5.738,-5.738) FD2(5.738,5.738)
  silkscreen extent -6.35,-4.65 4.65,4.65, body extent -6,-6 6,6, height 1.6
RESC1005N [mm] "Chip Resistor, Body 1.1x0.5mm, IPC Medium Density"
  rect 0.8x0.7 smd: 1(-0.6,0) 2(0.6,0)
  body extent -0.5,-0.25 0.5,0.25, height 0.35
RESC1608N [mm] "Chip Resistor, Body 1.6x0.8mm, IPC Medium Density"
  rect 0.9x1 smd: 1(-0.85,0) 2(0.85,0)
  silkscreen extent -0.15,-0.4 0.15,0.4, body extent -0.8,-0.4 0.8,0.4, height 0.45
RESC2012N [mm] "Chip Resistor, Body 2.0x1.3mm, IPC Medium Density"
  rect 1.2x1.4 smd: 1(-0.9,0) 2(0.9,0)
  silkscreen extent 0,-0.6 0,0.6, body extent -1,-0.62 1,0.63, height 0.5
RESC3216N [mm] "Chip Resistor, Body 3.2x1.6mm, IPC Medium Density"
  rect 1.3x1.8 smd: 1(-1.45,0) 2(1.45,0)
  silkscreen extent -0.4,-0.8 0.4,0.8, body extent -1.55,-0.8 1.55,0.8, height 0.55
RJ45-8P8C-VERT-THT-MAGJACK [mm]
  round 1.4 hole 0.9: 1(4.445,-3.96) 2(3.175,-6.5) 3(1.905,-3.96) 4(0.635,-6.5) 5(-0.635,-3.96) 6(-1.905,-6.5) 7(-3.175,-3.96) 8(-4.445,-6.5) 9(6.325,6.5) 10(3.785,6.5) 11(-3.785,6.5) 12(-6.325,6.5)
  round 2.5 hole 1.63: MH1(-7.9,-1.5) MH2(7.9,-1.5)
  round 3.2 hole 3.2: MH3(-5.715,2.39) MH4(5.715,2.39)
  silkscreen extent -8.38,-8.06 8.37,9.12, body extent -8.25,-7.91 8.25,8.99, height 16.95
SOD2512X110N [mm]
  rect 1x0.5 smd: A(1.2,0) C(-1.2,0)
  silkscreen extent -1.7,-0.63 0.85,0.63, body extent -1.25,-0.63 1.25,0.63, height 1.1
SOD3705X110-2N [mm]
  rect 0.91x1.22 smd: A(1.635,0) C(-1.635,0)
  silkscreen extent -1.78,-0.85 1.35,1.09, body extent -1.92,-0.85 1.92,0.85, height 1.36
SOIC127P600X175-8N [mm]
  rect 1.525x0.65 smd: 1(-2.712,1.905) 2(-2.712,0.635) 3(-2.712,-0.635) 4(-2.712,-1.905) 5(2.712,-1.905) 6(2.712,-0.635) 7(2.712,0.635) 8(2.712,1.905)
  silkscreen extent -3.47,-2.45 1.6,2.58, body extent -3.01,-2.45 3.01,2.45, height 1.63
SOIC127P1030X265-16N [mm]
  rect 1.85x0.65 smd: 1(-4.675,4.445) 2(-4.675,3.175) 3(-4.675,1.905) 4(-4.675,0.635) 5(-4.675,-0.635) 6(-4.675,-1.905) 7(-4.675,-3.175) 8(-4.675,-4.445) 9(4.675,-4.445) 10(4.675,-3.175) 11(4.675,-1.905) 12(4.675,-0.635) 13(4.675,0.635) 14(4.675,1.905) 15(4.675,3.175) 16(4.675,4.445)
  silkscreen extent -5.6,-5.15 3.4,5.15, body extent -5.15,-5.15 5.15,5.15, height 2.65
SOP50P640X110-39N [mm]
  rect 1.45x0.3 smd: 1(-2.925,4.5) 2(-2.925,4) 3(-2.925,3.5) 4(-2.925,3) 5(-2.925,2.5) 6(-2.925,2) 7(-2.925,1.5) 8(-2.925,1) 9(-2.925,0.5) 10(-2.925,0) 11(-2.925,-0.5) 12(-2.925,-1) 13(-2.925,-1.5) 14(-2.925,-2) 15(-2.925,-2.5) 16(-2.925,-3) 17(-2.925,-3.5) 18(-2.925,-4) 19(-2.925,-4.5) 20(2.925,-4.5) 21(2.925,-4) 22(2.925,-3.5) 23(2.925,-3) 24(2.925,-2.5) 25(2.925,-2) 26(2.925,-1.5) 27(2.925,-1) 28(2.925,-0.5) 29(2.925,0) 30(2.925,0.5) 31(2.925,1) 32(2.925,1.5) 33(2.925,2) 34(2.925,2.5) 35(2.925,3) 36(2.925,3.5) 37(2.925,4) 38(2.925,4.5)
  rect 3.3x6.6 smd: 39(0,0)
  oval 2.3x4.6 hole 2.3 slot 4.6 at 90 deg: 39(0,0)
  silkscreen extent -3.65,5 -2.2,5, body extent -3.2,-4.85 3.2,4.85, height 1.1
SOP50P1030X245-37N [mm]
  rect 1.65x0.3 smd: 1(-4.775,4.25) 2(-4.775,3.75) 3(-4.775,3.25) 4(-4.775,2.75) 5(-4.775,2.25) 6(-4.775,1.75) 7(-4.775,1.25) 8(-4.775,0.75) 9(-4.775,0.25) 10(-4.775,-0.25) 11(-4.775,-0.75) 12(-4.775,-1.25) 13(-4.775,-1.75) 14(-4.775,-2.25) 15(-4.775,-2.75) 16(-4.775,-3.25) 17(-4.775,-3.75) 18(-4.775,-4.25) 19(4.775,-4.25) 20(4.775,-3.75) 21(4.775,-3.25) 22(4.775,-2.75) 23(4.775,-2.25) 24(4.775,-1.75) 25(4.775,-1.25) 26(4.775,-0.75) 27(4.775,-0.25) 28(4.775,0.25) 29(4.775,0.75) 30(4.775,1.25) 31(4.775,1.75) 32(4.775,2.25) 33(4.775,2.75) 34(4.775,3.25) 35(4.775,3.75) 36(4.775,4.25)
  rect 4.6x7.4 smd: 37(0,0)
  oval 2.6x5.4 hole 2.6 slot 5.4 at 90 deg: 37(0,0)
  silkscreen extent -5.6,4.75 -3.95,4.75, body extent -5.15,-5.15 5.15,5.15, height 2.45
SOT95P230X117-3N [mm]
  rect 1.25x0.6 smd: 1(-1,0.95) 2(-1,-0.95) 3(1,0)
  silkscreen extent -1.63,-1.45 0.03,1.5, body extent -1.15,-1.45 1.15,1.45, height 1.17
SOT95P280X145-6N [mm]
  rect 1.15x0.6 smd: 1(-1.3,0.95) 2(-1.3,0) 3(-1.3,-0.95) 4(1.3,-0.95) 5(1.3,0) 6(1.3,0.95)
  silkscreen extent -1.88,-1.46 0.38,1.6, body extent -1.4,-1.46 1.4,1.46, height 1.45
TO252P170-3N [mm] "TO252-3 (DPAK)"
  rect 3x1.6 smd: 1(-3.325,2.3) 2(-3.325,-2.3)
  rect 6.7x6.7 smd: 3(3.325,0)
  silkscreen extent -1.15,-3.25 -0.3,3.25, body extent -3.93,-3.25 5.79,3.25, height 2.4
TP-1MM [mm]
  round 1 smd: 1(0,0)
TPH1.6D3.2BLK [mm] "Test point Mtg. Hole 1.6, loop 3.2"
  round 2.4 hole 1.6: 1(0,0)
  silkscreen extent -1.59,-1.59 1.59,1.59, body extent -1.59,-1.6 1.59,1.6, height 5.6
XTAL3215 [mm]
  rect 1.1x1.9 smd: 1(-1.25,0) 2(1.25,0)
  silkscreen extent -0.44,-0.71 0.45,0.76, body extent -1.6,-0.75 1.6,0.75, height 0.8
XTAL3225 [mm]
  rect 1.3x1.1 smd: 1(-1.15,-0.9) 2(1.15,-0.9) 3(1.15,0.9) 4(-1.15,0.9)
  silkscreen extent -1.6,-1.75 1.6,1.25, body extent -1.6,-1.25 1.6,1.25, height 0.65

## Part data
C1 C2 C3 C6 C7 C8 C9 C10 C17 C18 C19 C20 C21 C22 C23 C24: library part C-MLCC-22nF-100V-10%-0805, "Multilayer Ceramic Capacitors MLCC - SMD/SMT 100 V 0.022 uF X7R 0805 10%", JLCPCB Part #=C107137, Manufacturer=YAGEO, Part Number=CC0805KRX7R0BB223, Digikey Part #=311-1473-1-ND, Mounting Type=SMT, Mouser Part #=603-CC805KRX7R0BB223
C4 C28 C41 C42 C43 C45 C46 C48 C49 C50 C51 C54 C57 C64 C65 C66 C67 C72 C73 C74 C75 C76: library part C-MLCC-100nF-50V-10%-0402, "Multilayer Ceramic Capacitors MLCC - SMD/SMT 50 V 0.1uF X7R 0402 10%", JLCPCB Part #=C105882, Manufacturer=YAGEO, Part Number=CC0402KRX5R9BB104, Digikey Part #=311-3342-1-ND, Mounting Type=SMT, Mouser Part #=603-CC402KRX5R9BB104
C5: library part C-MLCC-33nF-100V-10%-0805, "Multilayer Ceramic Capacitors MLCC - SMD/SMT 100 V 0.033 uF X7R 0805 10%", JLCPCB Part #=C327114, Manufacturer=YAGEO, Part Number=CC0805KKX7R0BB333, Digikey Part #=311-1875-1-ND, Mounting Type=SMT, Mouser Part #=603-CC805KKX7R0BB333
C11 C12 C13 C14 C25 C34 C35 C36 C37: library part C-MLCC-33pF-50V-10%-0402, "Multilayer Ceramic Capacitors MLCC - SMD/SMT 50 V 33 pF C0G 0402 1%", JLCPCB Part #=C107005, Manufacturer=YAGEO, Part Number=CC0402KRNPO9BN330, Digikey Part #=13-CC0402KRNPO9BN330CT-ND, Mounting Type=SMT, Mouser Part #=603-CC0402KRNP9BN330
C15 C52: library part C-MLCC-1uF-50V-10%-0402, "Multilayer Ceramic Capacitors MLCC - SMD/SMT 50V 1uF X5R 0402 10% HI CV", JLCPCB Part #=C7500380, Manufacturer=YAGEO, Part Number=CC0402KRX5R9BB105, Digikey Part #=13-CC0402KRX5R9BB105CT-ND, Mounting Type=SMT, Mouser Part #=603-CC0402KX5R9BB105
C16 C33 C38 C39 C40: library part C-MLCC-100pF-50V-10%-0402, "Multilayer Ceramic Capacitors MLCC - SMD/SMT 50 V 100pF X7R 0402 10%", JLCPCB Part #=C281751, Manufacturer=YAGEO, Part Number=CC0402KRX7R9BB101, Digikey Part #=311-1419-1-ND, Mounting Type=SMT, Mouser Part #=603-CC402KRX7R9BB101
C26: library part C-MLCC-22nF-50V-10%-0402, "Multilayer Ceramic Capacitors MLCC - SMD/SMT 50 V 0.022uF X7R 0402 10%", JLCPCB Part #=C107026, Manufacturer=YAGEO, Part Number=CC0402KRX7R9BB223, Digikey Part #=311-1722-1-ND, Mounting Type=SMT, Mouser Part #=603-CC402KRX7R9BB223
C27 C29 C30: library part C-MLCC-10nF-50V-10%-0402, "Multilayer Ceramic Capacitors MLCC - SMD/SMT 50 V 0.01uF X7R 0402 10%", JLCPCB Part #=C60133, Manufacturer=YAGEO, Part Number=CC0402KRX7R9BB103, Digikey Part #=311-1349-1-ND, Mounting Type=SMT, Mouser Part #=603-CC402KRX7R9BB103
C31: library part C-MLCC-470nF-50V-10%-0402, "Multilayer Ceramic Capacitors MLCC - SMD/SMT 50 V 0.470uF X7R 0402 10%", JLCPCB Part #=C513552, Manufacturer=YAGEO, Part Number=CC0402KRX5R9BB474, Digikey Part #=13-CC0402KRX5R9BB474CT-ND, Mounting Type=SMT, Mouser Part #=603-CC0402KRX59BB474
C32 C71: library part C-MLCC-4.7uF-10V-10%-0402, "Multilayer Ceramic Capacitors MLCC - SMD/SMT 10V 4.7uF X5R 0402 10% HI CV", JLCPCB Part #=C326586, Manufacturer=YAGEO, Part Number=CC0402KRX5R6BB475, Digikey Part #=13-CC0402KRX5R6BB475CT-ND, Mounting Type=SMT, Mouser Part #=603-CC0402KR5R6BB475
C53: library part C-MLCC-470pF-50V-10%-0402, "Multilayer Ceramic Capacitors MLCC - SMD/SMT 50 V 470pF X7R 0402 10%", JLCPCB Part #=C106207, Manufacturer=YAGEO, Part Number=CC0402KRX7R9BB471, Digikey Part #=311-1028-1-ND, Mounting Type=SMT, Mouser Part #=603-CC402KRX7R9BB471
C55 C56 C68 C69 C70 C79: library part C-MLCC-12pF-50V-10%-0402, "Multilayer Ceramic Capacitors MLCC - SMD/SMT 50 V 12 pF C0G 0402 1%", JLCPCB Part #=C326662, Manufacturer=YAGEO, Part Number=CC0402FRNPO9BN120, Digikey Part #=311-1641-1-ND, Mounting Type=SMT, Mouser Part #=603-CC402FRNPO9BN120
C58 C63: library part C-MLCC-10uF-16V-10%-0805, "Multilayer Ceramic Capacitors MLCC - SMD/SMT 16V 10uF X5R 0805 10%", JLCPCB Part #=C89827, Manufacturer=YAGEO, Part Number=CC0805KKX5R7BB106, Digikey Part #=311-1865-1-ND, Mounting Type=SMT, Mouser Part #=603-CC805KKX5R7BB106
C60: library part C-MLCC-1000pF-2kV-10%-1206, "Multilayer Ceramic Capacitors MLCC - SMD/SMT 2kV 1000pF X7R 1206 10%", JLCPCB Part #=C23631, Manufacturer=YAGEO, Part Number=CC1206KKX7RDBB102, Digikey Part #=311-1487-1-ND, Mounting Type=SMT, Mouser Part #=603-CC206KKX7RDBB102
C61 C62: library part C-MLCC-4.7uF-50V-10%-0805, "Multilayer Ceramic Capacitors MLCC - SMD/SMT 50V 4.7uF X5R 0805 10%", JLCPCB Part #=C2897302, Manufacturer=YAGEO, Part Number=CC0805KKX5R9BB475, Digikey Part #=13-CC0805KKX5R9BB475CT-ND, Mounting Type=SMT, Mouser Part #=603-CC0805KKX59BB475